# EAGLE board ADS8588S (EAGLE 9.5.2)
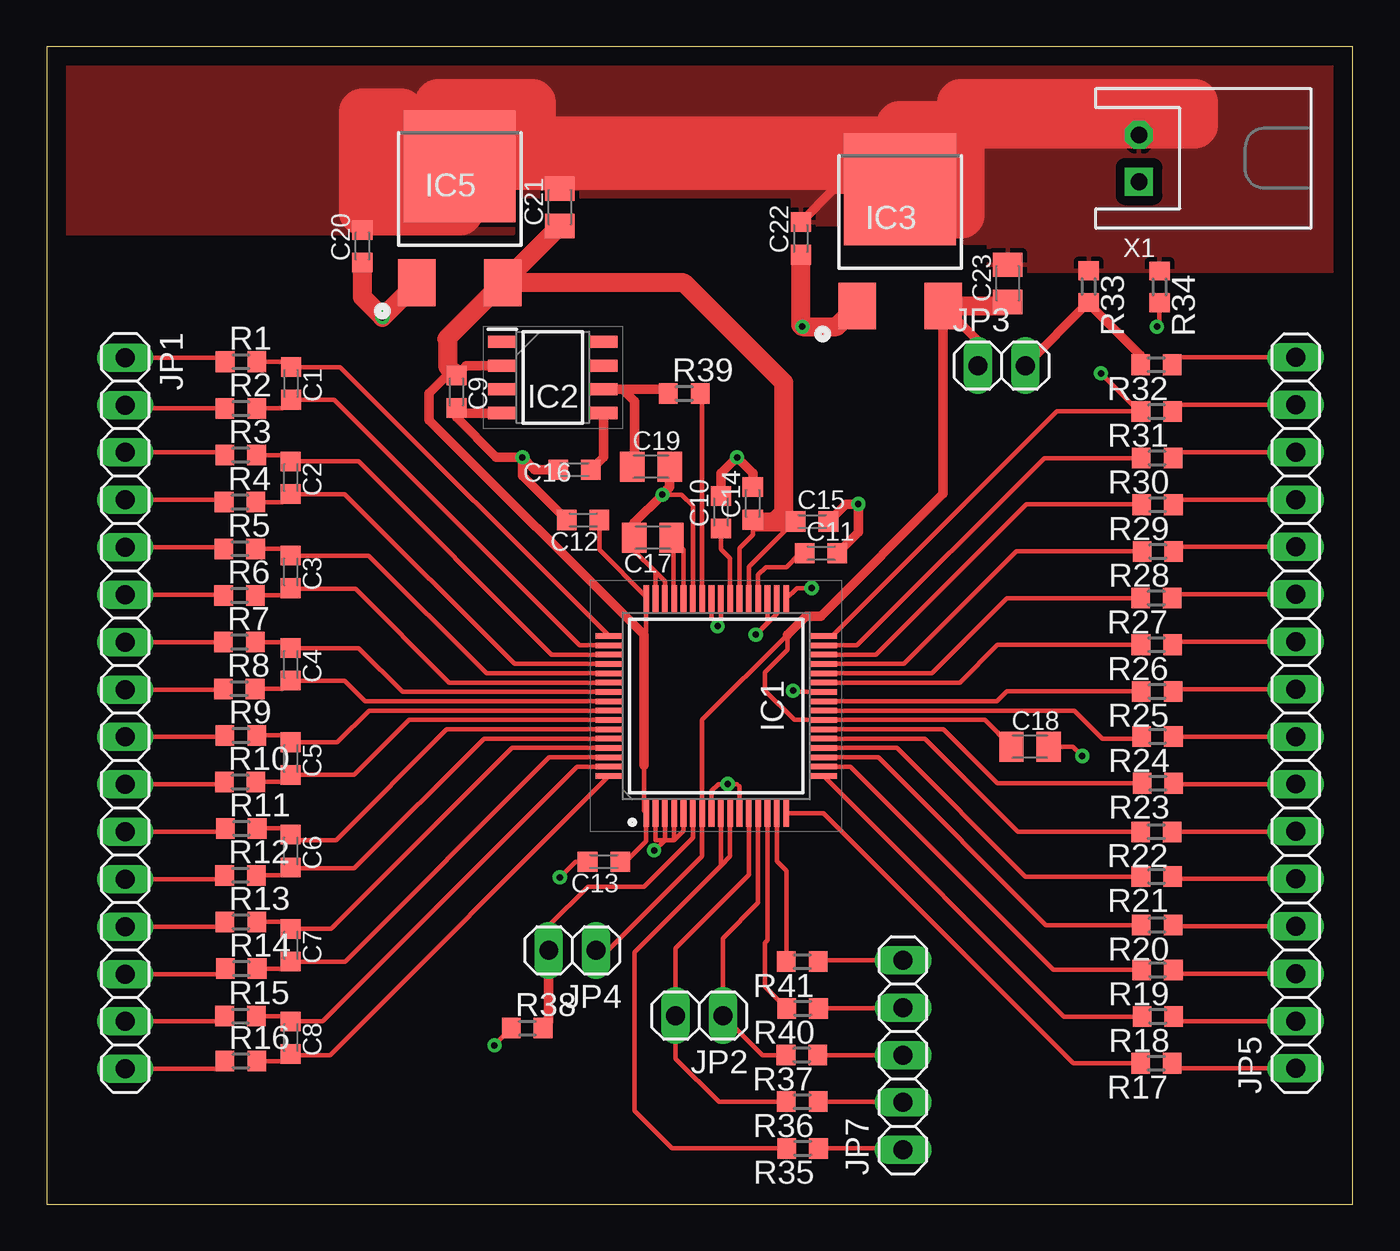
[diagram p0: board, top side]
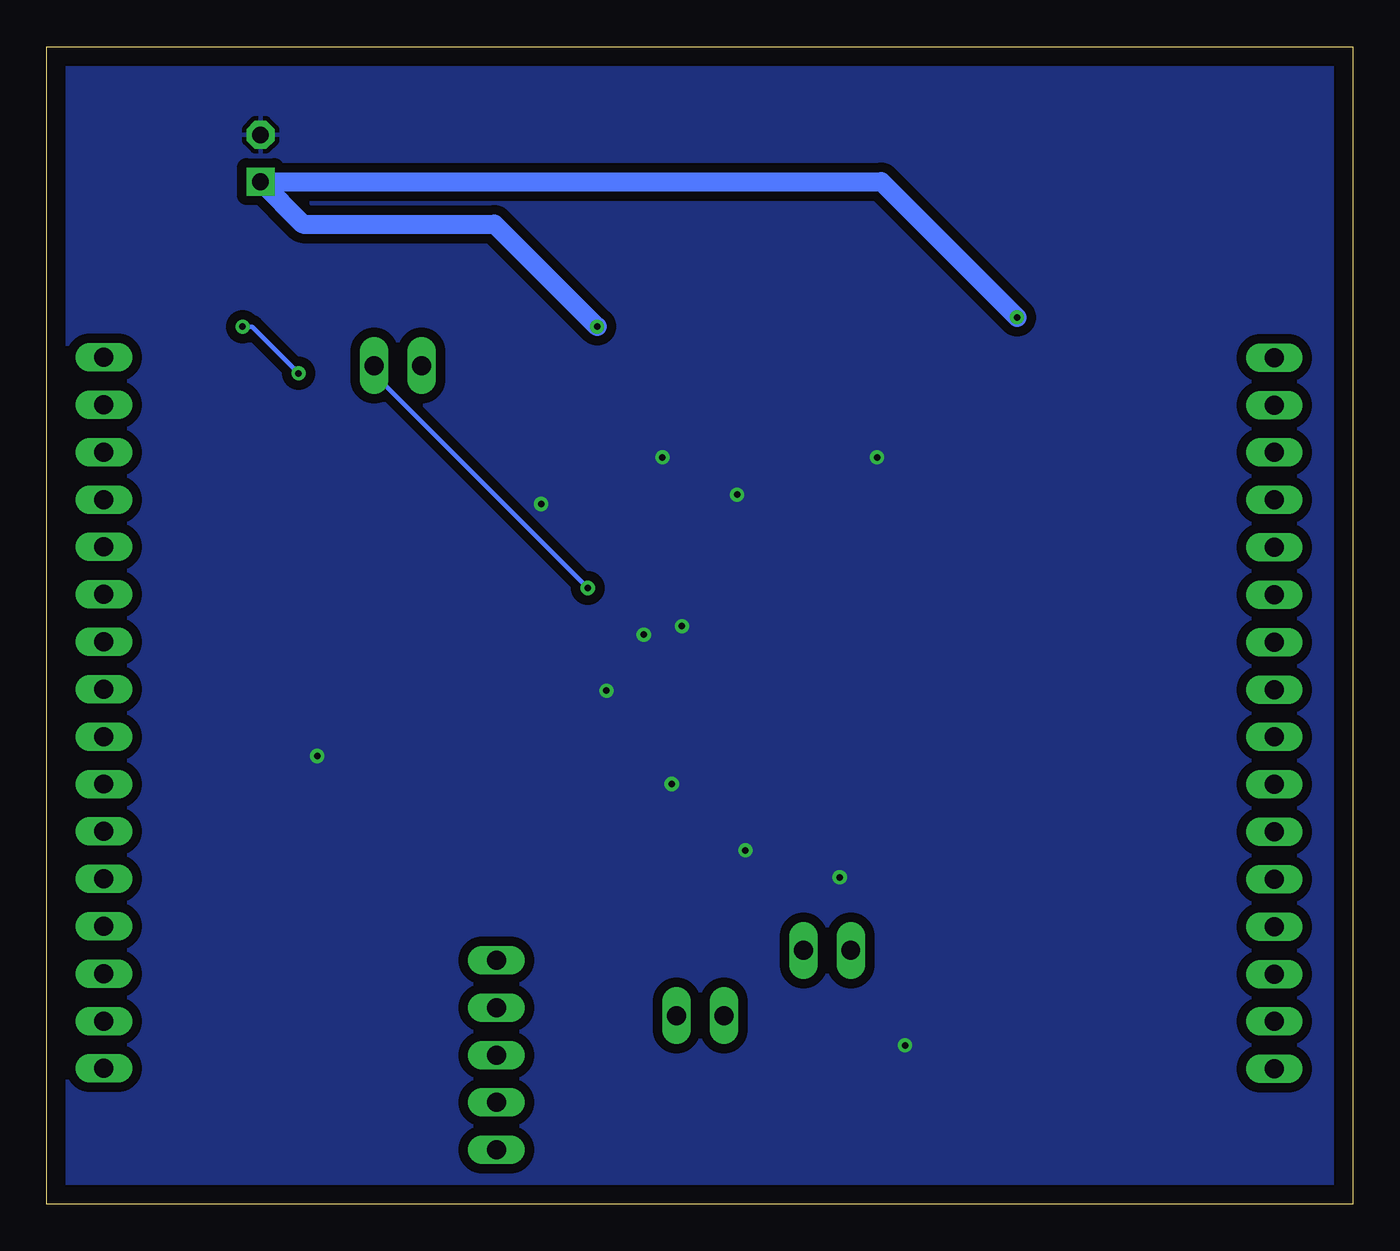
[diagram p1: board, bottom side, seen from below]

Size 70 x 62 mm. Coordinates in mm from the lower left corner, seen from the top.
Outline: 0,0 70,0 70,62 0,62 0,0
Copper layers (1*16): Top 0.035mm / dielectric 1.5mm / Bottom 0.035mm
Design rules "default": minimum track width 6mil, minimum drill 0.35mm, track to track 6mil, track to pad 6mil, pad to pad 6mil, via to via 6mil, smd to smd 6mil, copper to edge 40mil, drill to drill 6mil, minimum pad ring 10mil, minimum via ring 8mil, stop-mask expansion 4mil, vias tented up to drill 0mil, thermal gap 10mil
Net classes: 0 default: clearance 0.508 mm

## Footprints (pad centres in the part's own frame; a part is rotated, then mirrored left to right if it is on the bottom)
C0603K = smd 1.05 x 1.08: 1 -0.875,0; 2 0.875,0
C0805K = smd 1.3 x 1.6: 1 -1,0; 2 1,0
QFP50P1200X1200X160-64N = smd 1.475 x 0.3: 1 -5.738,3.75; 2 -5.738,3.25; 3 -5.738,2.75; 4 -5.738,2.25; 5 -5.738,1.75; 6 -5.738,1.25; 7 -5.738,0.75; 8 -5.738,0.25; 9 -5.738,-0.25; 10 -5.738,-0.75; 11 -5.738,-1.25; 12 -5.738,-1.75; 13 -5.738,-2.25; 14 -5.738,-2.75; 15 -5.738,-3.25; 16 -5.738,-3.75; 33 5.738,-3.75; 34 5.738,-3.25; 35 5.738,-2.75; 36 5.738,-2.25; 37 5.738,-1.75; 38 5.738,-1.25; 39 5.738,-0.75; 40 5.738,-0.25; 41 5.738,0.25; 42 5.738,0.75; 43 5.738,1.25; 44 5.738,1.75; 45 5.738,2.25; 46 5.738,2.75; 47 5.738,3.25; 48 5.738,3.75 | smd 0.3 x 1.475: 17 -3.75,-5.738; 18 -3.25,-5.738; 19 -2.75,-5.738; 20 -2.25,-5.738; 21 -1.75,-5.738; 22 -1.25,-5.738; 23 -0.75,-5.738; 24 -0.25,-5.738; 25 0.25,-5.738; 26 0.75,-5.738; 27 1.25,-5.738; 28 1.75,-5.738; 29 2.25,-5.738; 30 2.75,-5.738; 31 3.25,-5.738; 32 3.75,-5.738; 49 3.75,5.738; 50 3.25,5.738; 51 2.75,5.738; 52 2.25,5.738; 53 1.75,5.738; 54 1.25,5.738; 55 0.75,5.738; 56 0.25,5.738; 57 -0.25,5.738; 58 -0.75,5.738; 59 -1.25,5.738; 60 -1.75,5.738; 61 -2.25,5.738; 62 -2.75,5.738; 63 -3.25,5.738; 64 -3.75,5.738
SOIC127P600X175-8N = smd 1.525 x 0.65: 1 -2.712,1.905; 2 -2.712,0.635; 3 -2.712,-0.635; 4 -2.712,-1.905; 5 2.712,-1.905; 6 2.712,-0.635; 7 2.712,0.635; 8 2.712,1.905
TO-252-3-L1 = smd 2 x 2.5: 1 -2.3,-8.05; 2 2.3,-8.05 | smd 6 x 6: 3 0,-1.8
1X16 = drill 1.016 long: 1 -19.05,0; 2 -16.51,0; 3 -13.97,0; 4 -11.43,0; 5 -8.89,0; 6 -6.35,0; 7 -3.81,0; 8 -1.27,0; 9 1.27,0; 10 3.81,0; 11 6.35,0; 12 8.89,0; 13 11.43,0; 14 13.97,0; 15 16.51,0; 16 19.05,0
1X02 = drill 1.016 long: 1 -1.27,0; 2 1.27,0
1X05 = drill 1.016 long: 1 -5.08,0; 2 -2.54,0; 3 0,0; 4 2.54,0; 5 5.08,0
R0603 = smd 1 x 1.1: 1 -0.85,0; 2 0.85,0
S2B-XH-A = drill 0.9 pad 1.5 square: 1 1.25,0 | drill 0.9 pad 1.5 octagon: 2 -1.25,0

## Placement (x,y rotation side)
C1  1000p  [C0603K]  13.1,43.96 270 top
C2  1000p  [C0603K]  13.08,38.91 270 top
C3  1000p  [C0603K]  13.08,33.86 270 top
C4  1000p  [C0603K]  13.08,28.91 270 top
C5  1000p  [C0603K]  13.08,23.86 270 top
C6  1000p  [C0603K]  13.08,18.91 270 top
C7  1000p  [C0603K]  13.08,13.86 270 top
C8  1000p  [C0603K]  13.08,8.91 270 top
C9  1u  [C0603K]  21.96,43.51 270 top
C10  1u  [C0603K]  36.14,37.06 90 top
C11  1u  [C0603K]  41.5,34.86 0 top
C12  1u  [C0603K]  28.75,36.64 180 top
C13  1u  [C0603K]  29.86,18.34 180 top
C14  1u  [C0603K]  37.84,37.53 90 top
C15  1u  [C0603K]  41.02,36.56 0 top
C16  1u  [C0603K]  28.29,39.34 180 top
C17  10u  [C0805K]  32.49,35.7 180 top
C18  10u  [C0805K]  52.7,24.5 0 top
C19  10u  [C0805K]  32.39,39.5 0 top
C20  0.33u  [C0603K]  16.92,51.31 90 top
C21  2.2u  [C0805K]  27.5,53.4 90 top
C22  0.33u  [C0603K]  40.42,51.73 90 top
C23  2.2u  [C0805K]  51.5,49.32 90 top
IC1  ADS8578SIPM  [QFP50P1200X1200X160-64N]  35.88,26.68 90 top
IC2  REF5025AIDR  [SOIC127P600X175-8N]  27.13,44.28 0 top
IC3  NJM2845DL1-33-TE1  [TO-252-3-L1]  45.74,56.16 0 top
IC5  NJM2845DL1-05-TE1  [TO-252-3-L1]  22.14,57.4 0 top
JP1  [1X16]  4.21,26.29 270 top
JP2  [1X02]  34.98,10.09 180 top
JP3  [1X02]  51.17,44.91 0 top
JP4  [1X02]  28.18,13.59 180 top
JP5  [1X16]  66.94,26.31 90 top
JP7  [1X05]  45.89,7.98 90 top
R1  1k  [R0603]  10.42,45.12 0 top
R2  1k  [R0603]  10.41,42.62 0 top
R3  1k  [R0603]  10.4,40.12 0 top
R4  1k  [R0603]  10.36,37.6 0 top
R5  1k  [R0603]  10.35,35.1 0 top
R6  1k  [R0603]  10.34,32.6 0 top
R7  1k  [R0603]  10.33,30.1 0 top
R8  1k  [R0603]  10.32,27.6 0 top
R9  1k  [R0603]  10.41,25.1 0 top
R10  1k  [R0603]  10.37,22.61 0 top
R11  1k  [R0603]  10.43,20.12 0 top
R12  1k  [R0603]  10.39,17.61 0 top
R13  1k  [R0603]  10.41,15.11 0 top
R14  1k  [R0603]  10.43,12.61 0 top
R15  1k  [R0603]  10.39,10.06 0 top
R16  1k  [R0603]  10.41,7.66 0 top
R17  50  [R0603]  59.47,7.54 180 top
R18  50  [R0603]  59.55,10.04 180 top
R19  50  [R0603]  59.53,12.54 180 top
R20  50  [R0603]  59.51,14.94 180 top
R21  50  [R0603]  59.49,17.54 180 top
R22  50  [R0603]  59.47,19.94 180 top
R23  50  [R0603]  59.55,22.54 180 top
R24  50  [R0603]  59.53,25.04 180 top
R25  50  [R0603]  59.51,27.46 180 top
R26  50  [R0603]  59.49,29.96 180 top
R27  50  [R0603]  59.47,32.46 180 top
R28  50  [R0603]  59.55,34.96 180 top
R29  50  [R0603]  59.53,37.46 180 top
R30  50  [R0603]  59.51,39.96 180 top
R31  50  [R0603]  59.49,42.46 180 top
R32  50  [R0603]  59.47,44.96 180 top
R33  5k  [R0603]  55.84,49.15 270 top
R34  5k  [R0603]  59.64,49.13 270 top
R35  50  [R0603]  40.51,2.98 180 top
R36  50  [R0603]  40.49,5.48 180 top
R37  50  [R0603]  40.47,7.98 180 top
R38  5k  [R0603]  25.75,9.42 0 top
R39  50  [R0603]  34.17,43.42 0 top
R40  50  [R0603]  40.51,10.48 180 top
R41  50  [R0603]  40.49,12.98 180 top
X1  S2B-XH-A  [S2B-XH-A]  58.54,56.02 270 top

## Library data of the parts
C1-C23 = rcl; SPICEPREFIX: C
IC1 = SamacSys_Parts; DESCRIPTION: 14-Bit High-Speed 8-Channel Simultaneous-Sampling ADC With Bipolar Inputs on a Single Supply; HEIGHT: 1.6mm; MANUFACTURER_NAME: Texas Instruments; MANUFACTURER_PART_NUMBER: ADS8578SIPM; MOUSER_PART_NUMBER: 595-ADS8578SIPM; MOUSER_PRICE-STOCK: https://www.mouser.co.uk/ProductDetail/Texas-Instruments/ADS8578SIPM?qs=5aG0NVq1C4wnC0s0XWUMqw%3D%3D
IC2 = SamacSys_Parts; DESCRIPTION: 3 Vpp/V Noise, 3 ppm/C Drift Precision Series Voltage Reference; HEIGHT: 1.75mm; MANUFACTURER_NAME: Texas Instruments; MANUFACTURER_PART_NUMBER: REF5025AIDR; MOUSER_PART_NUMBER: 595-REF5025AIDR; MOUSER_PRICE-STOCK: https://www.mouser.co.uk/ProductDetail/Texas-Instruments/REF5025AIDR?qs=xL7PkI2RoJ70M4JvRcjI4A%3D%3D
IC3 = SamacSys_Parts; DESCRIPTION: LDO Voltage Regulators LDO w/On/Off Cntrl; HEIGHT: mm; MANUFACTURER_NAME: New Japan Radio; MANUFACTURER_PART_NUMBER: NJM2845DL1-33-TE1; MOUSER_PART_NUMBER: 513-NJM2845DL133-TE1; MOUSER_PRICE-STOCK: https://www.mouser.co.uk/ProductDetail/NJR/NJM2845DL1-33-TE1/?qs=Vf9KeiGtj%252BHsxdmME1E7bA%3D%3D
IC5 = SamacSys_Parts; DESCRIPTION: LDO Voltage Regulators LDO w/On/Off Cntrl; HEIGHT: mm; MANUFACTURER_NAME: New Japan Radio; MANUFACTURER_PART_NUMBER: NJM2845DL1-05-TE1; MOUSER_PART_NUMBER: 513-NJM2845DL105-TE1; MOUSER_PRICE-STOCK: https://www.mouser.co.uk/ProductDetail/NJR/NJM2845DL1-05-TE1/?qs=Vf9KeiGtj%252BGbfCGSGlajaA%3D%3D
JP1-JP5 JP7 = pinhead
R1-R41 = rcl; SPICEPREFIX: R
X1 = con-JST XH

## Nets
+9V: C20.1 C22.1 IC3.1 IC5.1 X1.1
AIN1: C1.1 IC1.49 R1.2
AIN1+: JP1.1 R1.1
AIN1_GND: JP1.2 R2.1
AIN1GND: C1.2 IC1.50 R2.2
AIN2: C2.1 IC1.51 R3.2
AIN2+: JP1.3 R3.1
AIN2_GND: JP1.4 R4.1
AIN2GND: C2.2 IC1.52 R4.2
AIN3: C3.1 IC1.53 R5.2
AIN3+: JP1.5 R5.1
AIN3_GND: JP1.6 R6.1
AIN3GND: C3.2 IC1.54 R6.2
AIN4: C4.1 IC1.55 R7.2
AIN4+: JP1.7 R7.1
AIN4_GND: JP1.8 R8.1
AIN4GND: C4.2 IC1.56 R8.2
AIN5: C5.1 IC1.57 R9.2
AIN5+: JP1.9 R9.1
AIN5_GND: JP1.10 R10.1
AIN5GND: C5.2 IC1.58 R10.2
AIN6: C6.1 IC1.59 R11.2
AIN6+: JP1.11 R11.1
AIN6_GND: JP1.12 R12.1
AIN6GND: C6.2 IC1.60 R12.2
AIN7: C7.1 IC1.61 R13.2
AIN7+: JP1.13 R13.1
AIN7_GND: JP1.14 R14.1
AIN7GND: C7.2 IC1.62 R14.2
AIN8: C8.1 IC1.63 R15.2
AIN8+: JP1.15 R15.1
AIN8_GND: JP1.16 R16.1
AIN8GND: C8.2 IC1.64 R16.2
AVDD: C9.1 C12.1 C13.1 C14.1 C15.1 C21.1 IC1.1 IC1.37 IC1.38 IC1.48 IC2.2 IC5.2
BUSY: JP7.4 R40.1
CONVST: JP7.1 R35.1
DB0: JP5.1 R17.1
DB1: JP5.2 R18.1
DB2: JP5.3 R19.1
DB3: JP5.4 R20.1
DB4: JP5.5 R21.1
DB5: JP5.6 R22.1
DB6: JP5.7 R23.1
DB7: JP5.8 R24.1
DB8: JP5.9 R25.1
DB9: JP5.10 R26.1
DB10: JP5.11 R27.1
DB11: JP5.12 R28.1
DB12: JP5.13 R29.1
DB13: JP5.14 R30.1
DB14: JP5.15 R31.1
DB15: JP5.16 R32.1
DVDD: C18.1 C23.1 IC1.7 IC1.23 IC3.2 JP3.1 JP4.1
DVDD1: C19.1 IC2.6 R39.1
FRSTDATA: JP7.5 R41.1
GND: C9.2 C10.2 C11.2 C12.2 C13.2 C14.2 C15.2 C16.2 C17.2 C18.2 C19.2 C20.2 C21.2 C22.2 C23.2 IC1.2 IC1.3 IC1.4 IC1.5 IC1.8 IC1.11 IC1.26 IC1.34 IC1.35 IC1.40 IC1.41 IC1.43 IC1.46 IC1.47 IC2.4 IC3.3 IC5.3 R33.1 R34.1 R38.1 X1.2
N$1: C17.1 IC1.44 IC1.45
N$2: IC1.9 IC1.10 R35.2
N$3: C10.1 IC1.39
N$4: C11.1 IC1.36
N$5: IC1.17 R18.2
N$6: IC1.18 R19.2
N$7: IC1.19 R20.2
N$8: IC1.20 R21.2
N$9: IC1.21 R22.2
N$10: IC1.22 R23.2
N$11: IC1.24 R24.2
N$12: IC1.25 R25.2
N$13: IC1.27 R26.2
N$14: IC1.28 R27.2
N$15: IC1.29 R28.2
N$16: IC1.30 R29.2
N$17: IC1.31 R30.2
N$18: IC1.32 R31.2 R34.2
N$19: IC1.33 JP3.2 R32.2 R33.2
N$20: IC1.16 R17.2
N$21: IC1.6 JP4.2 R38.2
N$22: C16.1 IC2.5
N$23: IC1.12 JP2.2 R36.2
N$24: IC1.13 JP2.1 R37.2
N$25: IC1.15 R41.2
N$26: IC1.14 R40.2
VREF: IC1.42 R39.2
~CS: JP7.3 R37.1
~RD: JP7.2 R36.1

## Tracks (layer width: path | path; a pad name or v marks a point on that pad's centre or on a via)
+9V  (via drill 0.35)
  Top 1.016: IC5.1 v18,47.5 16.92,48.58 C20.1 | IC3.1 42.33,47 v40.5,47 40.42,47.08 C22.1
  Bottom 1.016: v18,47.5 25.27,54.77 X1.1 56.27,52.5 46,52.5 v40.5,47
AIN1
  Top 0.254: R1.2 12.81,45.12 C1.1 15.74,44.84 IC1.49
AIN1+
  Top 0.254: JP1.1 9.35,45.34 R1.1
AIN1_GND
  Top 0.254: JP1.2 4.39,42.62 R2.1
AIN1GND
  Top 0.254: R2.2 12.63,42.62 C1.2 15.41,43.09 28.57,29.93 IC1.50
AIN2
  Top 0.254: R3.2 12.74,40.12 C2.1 16.71,39.78 27.07,29.43 IC1.51
AIN2+
  Top 0.254: JP1.3 9.41,40.26 R3.1
AIN2_GND
  Top 0.254: JP1.4 9.39,37.72 R4.1
AIN2GND
  Top 0.254: R4.2 12.64,37.6 C2.2 15.96,38.03 25.07,28.93 IC1.52
AIN3
  Top 0.254: R5.2 12.71,35.1 C3.1 17.27,34.73 23.57,28.43 IC1.53
AIN3+
  Top 0.254: JP1.5 9.42,35.18 R5.1
AIN3_GND
  Top 0.254: JP1.6 9.45,32.64 R6.1
AIN3GND
  Top 0.254: R6.2 12.7,32.6 13.05,32.95 | 13.05,32.95 C3.2 | IC1.54 21.57,27.93 16.55,32.95 13.05,32.95
AIN4
  Top 0.254: R7.2 12.77,30.1 C4.1 16.71,29.79 19.07,27.43 IC1.55
AIN4+
  Top 0.254: JP1.7 R7.1
AIN4_GND
  Top 0.254: JP1.8 9.43,27.56 R8.1
AIN4GND
  Top 0.254: R8.2 12.64,27.6 C4.2 15.96,28.04 17.07,26.93 IC1.56
AIN5
  Top 0.254: R9.2 12.71,25.1 C5.1 15.58,24.73 17.27,26.43 IC1.57
AIN5+
  Top 0.254: JP1.9 9.48,25.02 R9.1
AIN5_GND
  Top 0.254: JP1.10 9.39,22.48 R10.1
AIN5GND
  Top 0.254: R10.2 12.71,22.61 C5.2 16.48,22.98 19.43,25.93 IC1.58
AIN6
  Top 0.254: R11.2 12.74,20.12 C6.1 13.37,19.5 15.5,19.5 21.43,25.43 IC1.59
AIN6+
  Top 0.254: JP1.11 9.4,19.94 R11.1
AIN6_GND
  Top 0.254: JP1.12 9.33,17.4 R12.1
AIN6GND
  Top 0.254: R12.2 12.65,17.61 13.02,17.98 | 13.02,17.98 C6.2 | IC1.60 23.43,24.93 16.48,17.98 13.02,17.98
AIN7
  Top 0.254: R13.2 12.71,15.11 C7.1 15.23,14.73 24.93,24.43 IC1.61
AIN7+
  Top 0.254: JP1.13 9.31,14.86 R13.1
AIN7_GND
  Top 0.254: JP1.14 9.29,12.32 R14.1
AIN7GND
  Top 0.254: R14.2 12.71,12.61 C7.2 15.98,12.98 26.93,23.93 IC1.62
AIN8
  Top 0.254: R15.2 12.8,10.06 C8.1 14.79,9.79 28.43,23.43 IC1.63
AIN8+
  Top 0.254: JP1.15 9.26,9.78 R15.1
AIN8_GND
  Top 0.254: JP1.16 9.14,7.24 R16.1
AIN8GND
  Top 0.254: R16.2 12.71,7.66 13.02,7.98 | 13.02,7.98 C8.2 | IC1.64 15.19,7.98 13.02,7.98
AVDD
  Top 0.254: C12.1 29.62,35.04 32.13,32.53 IC1.48 32.13,30.63 32,30.5 | IC1.38 37.13,35.13 37.84,35.84 C14.1 | IC1.37 37.63,34.13 40.06,36.56 C15.1 | C13.1 31.03,18.34 32.13,19.44 IC1.1 32,21.07 32,23.5
  Top 0.508: IC2.2 22.49,44.91 C9.1 21.46,44.38 20.5,43.42 20.5,42 32,30.5 32,23.5
  Top 1.016: C14.1 37.94,36.56 39,36.56 | 39,36.56 C15.1 | 39,36.56 39.5,37.06 39.5,44 34.15,49.35 IC5.2 | C21.1 IC5.2 | IC5.2 21.49,46.4 | 21.44,46.35 21.49,46.4 | 21.49,46.4 21.49,44.85 C9.1
BUSY
  Top 0.254: R40.1 45.85,10.48 JP7.4
CONVST
  Top 0.254: R35.1 45.81,2.98 JP7.1
DB0
  Top 0.254: R17.1 60.6,7.26 JP5.1
DB1
  Top 0.254: R18.1 60.64,9.8 JP5.2
DB2
  Top 0.254: R19.1 60.58,12.34 JP5.3
DB3
  Top 0.254: R20.1 60.42,14.88 JP5.4
DB4
  Top 0.254: R21.1 60.46,17.42 JP5.5
DB5
  Top 0.254: R22.1 66.92,19.94 JP5.6
DB6
  Top 0.254: R23.1 60.44,22.5 JP5.7
DB7
  Top 0.254: R24.1 JP5.8
DB8
  Top 0.254: R25.1 60.48,27.58 JP5.9
DB9
  Top 0.254: R26.1 60.5,30.12 JP5.10
DB10
  Top 0.254: R27.1 60.52,32.66 JP5.11
DB11
  Top 0.254: R28.1 60.64,35.2 JP5.12
DB12
  Top 0.254: R29.1 60.66,37.74 JP5.13
DB13
  Top 0.254: R30.1 60.68,40.28 JP5.14
DB14
  Top 0.254: R31.1 60.7,42.82 JP5.15
DB15
  Top 0.254: R32.1 60.72,45.36 JP5.16
DVDD
  Top 0.254: C18.1 50.27,25.93 IC1.23 40.07,25.93 38.5,27.5 38.5,28.5 39.7,29.7 39.7,30.5 35.13,25.93 IC1.7 35.13,18.63 30.09,13.59 JP4.1
  Top 0.508: 39.7,30.5 40.7,31.5 41.5,31.5 48.04,38.04 IC3.2 49.9,46.25 JP3.1
  Top 1.016: IC3.2 51.29,48.11 C23.1
DVDD1
  Top 0.508: IC2.6 29.89,43.65 | IC2.6 33.09,43.65 R39.1 | IC2.6 30.86,43.65 31.5,43 31.5,39.61 C19.1
FRSTDATA
  Top 0.254: R41.1 41.42,13.06 JP7.5
GND  (via drill 0.35)
  Top 0.254: IC1.2 32.63,19.5 33.13,19.5 | 33.13,19.5 IC1.3 | IC1.4 33.63,19.5 | 33.63,19.5 33.13,19.5 | IC1.5 34.13,20 33.63,19.5 | 33.13,19.5 v32.57,18.94 v32.56,18.94 | C13.2 28.34,18.34 v27.5,17.5 | R38.1 24,8.52 v24,8.5 | C18.2 55,24.5 v55.5,24 | IC1.11 37.13,22.37 37,22.5 v36.5,22.5 36,22.5 35.63,22.13 IC1.8 | IC1.47 32.63,33.86 | 32.63,33.86 31.49,35 C17.2 | IC1.46 33.13,33.36 32.63,33.86 | v33,38 34.03,38 34.63,37.41 IC1.43 | IC1.35 38.63,31.13 v38,30.5 39.13,31.63 IC1.34 | IC1.26 40.07,27.43 v40,27.5 | IC1.41 35.63,31.37 36,31 | 36,31 v35.95,30.95 | IC1.40 36.13,31.13 36,31
  Top 0.508: C20.2 16.92,53 | C22.2 42.17,54.36 IC3.3 | C19.2 33.39,38.39 v33,38 31.49,36.49 C17.2 | C16.2 26.16,39.34 v25.5,40 | IC2.4 22.22,42.38 C9.2 21.96,42.13 24.09,40 v25.5,40 | C12.2 25.5,39.02 v25.5,40 | C10.2 36.14,39.14 v37,40 37.84,39.16 C14.2 | C15.2 42.84,37.5 v43.5,37.5 43.5,35.98 C11.2
  Top 2.54: IC5.3 46,55.6 46,54.36 IC3.3 45.74,57.81 61.5,57.81 61.5,59 49,59 49,53 44.5,53 44.5,57 26,57 26,59 21,59 21,54.5 19,54.5 19,58.5 16.92,58.5 16.92,53.14 22.14,53.14 IC5.3
  Bottom 0.254: v32.56,18.94 32.5,18.94 32.5,19 | v35.95,30.95 36,31
  pour Bottom: 70,0 0,0 0,62 70,62
  pour Top: 0,62 0,52 25,52 25,54 39.5,54 40,54 40,52.5 43,52.5 43,51.5 48.5,51.5 50.5,51.5 50.5,50 70,50 70,62
N$1
  Top 0.254: IC1.45 33.6,32.45 33.6,35.59 C17.1 34.13,35.06 IC1.44
N$2
  Top 0.254: IC1.9 36.13,18.13 | R35.2 33.52,2.98 31.5,5 31.5,13.5 36.13,18.13 | IC1.10 36.63,18.63 36.13,18.13
N$3
  Top 0.254: IC1.39 36.63,34.59 36.14,35.09 C10.1
N$4
  Top 0.254: C11.1 40.38,34.86 39.64,34.12 38.54,34.12 38.13,33.72 IC1.36
N$5
  Top 0.254: IC1.17 54.51,10.04 R18.2
N$6
  Top 0.254: IC1.18 43.07,23.43 53.96,12.54 R19.2
N$7
  Top 0.254: IC1.19 44.57,23.93 53.56,14.94 R20.2
N$8
  Top 0.254: IC1.20 45.57,24.43 52.46,17.54 R21.2
N$9
  Top 0.254: IC1.21 45.92,24.93 45.93,24.92 47.08,24.92 52.06,19.94 R22.2
N$10
  Top 0.254: IC1.22 48.07,25.43 50.96,22.54 R23.2
N$11
  Top 0.254: IC1.24 55.07,26.43 56.58,24.92 58.56,24.92 R24.2
N$12
  Top 0.254: IC1.25 50.93,26.93 51.46,27.46 R25.2
N$13
  Top 0.254: IC1.27 48.93,27.93 50.96,29.96 R26.2
N$14
  Top 0.254: IC1.28 47.43,28.43 51.46,32.46 R27.2
N$15
  Top 0.254: IC1.29 45.93,28.93 51.96,34.96 R28.2
N$16
  Top 0.254: IC1.30 44.43,29.43 52.5,37.5 58.64,37.5 R29.2
N$17
  Top 0.254: IC1.31 43.43,29.93 53.46,39.96 R30.2
N$18  (via drill 0.35)
  Top 0.254: IC1.32 42.12,30.43 54.15,42.46 R31.2 58.54,42.46 v56.5,44.5 | v59.5,47 59.64,47.14 R34.2
  Bottom 0.254: v56.5,44.5 59,47 v59.5,47
N$19  (via drill 0.35)
  Top 0.254: 58.58,45 R32.2 | IC1.33 40.21,33 v41,33
  Top 0.508: R32.2 58.62,45.46 55.84,48.24 R33.2 JP3.2
  Bottom 0.254: v41,33 52.44,44.44 JP3.2
N$20
  Top 0.254: IC1.16 41.63,20.94 55.03,7.54 R17.2
N$21
  Top 0.254: IC1.6 34.63,19.63 32,17 29,17 26.91,14.91 JP4.2
  Top 0.508: JP4.2 26.91,9.73 R38.2
N$22
  Top 0.508: IC2.5 29.84,40.02 C16.1
N$23
  Top 0.254: IC1.12 37.63,17.63 33.71,13.71 JP2.2 33.71,7.79 36.02,5.48 R36.2
N$24
  Top 0.254: IC1.13 38.13,16.13 36.25,14.25 JP2.1 38.36,7.98 R37.2
N$25
  Top 0.254: IC1.15 39.13,18.37 39.64,17.86 R41.2
N$26
  Top 0.254: IC1.14 38.63,14.13 38.5,14 38.5,11.64 R40.2
VREF
  Top 0.254: IC1.42 35.13,43.31 R39.2
~CS
  Top 0.254: R37.1 JP7.3
~RD
  Top 0.254: R36.1 45.85,5.48 JP7.2